# Altium PCB PCB_Final.PcbDoc
Units mm, origin at the board's own origin, x right, y up, seen from the top; angles counter-clockwise.
Board outline 57.53 x 59.31 mm, 2 copper layers (Top Layer, Bottom Layer); 42 components, 23 nets, 210 pads, 0 vias.
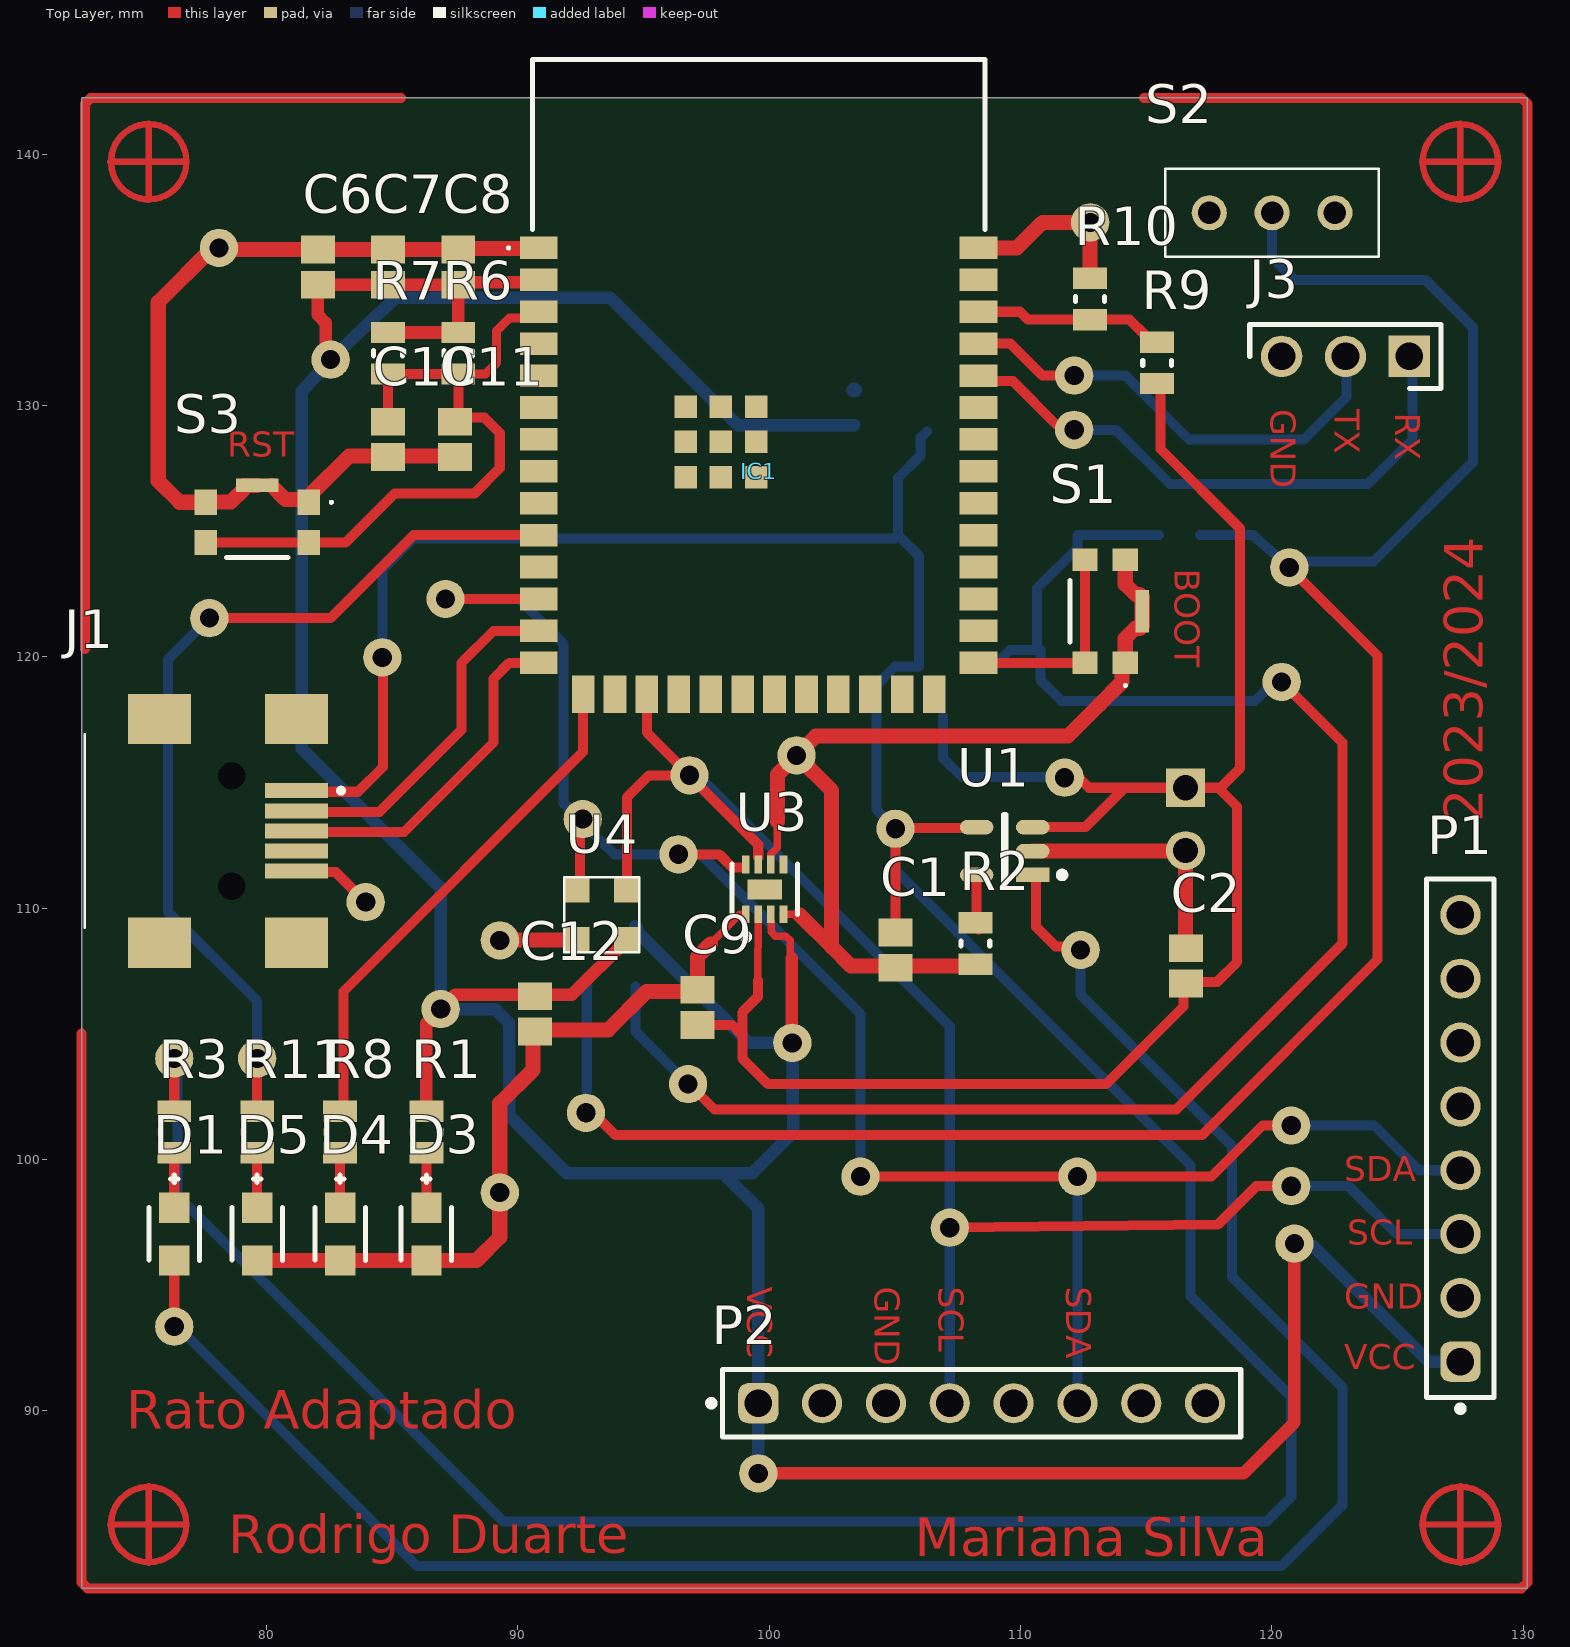
[diagram p0: Top Layer view]
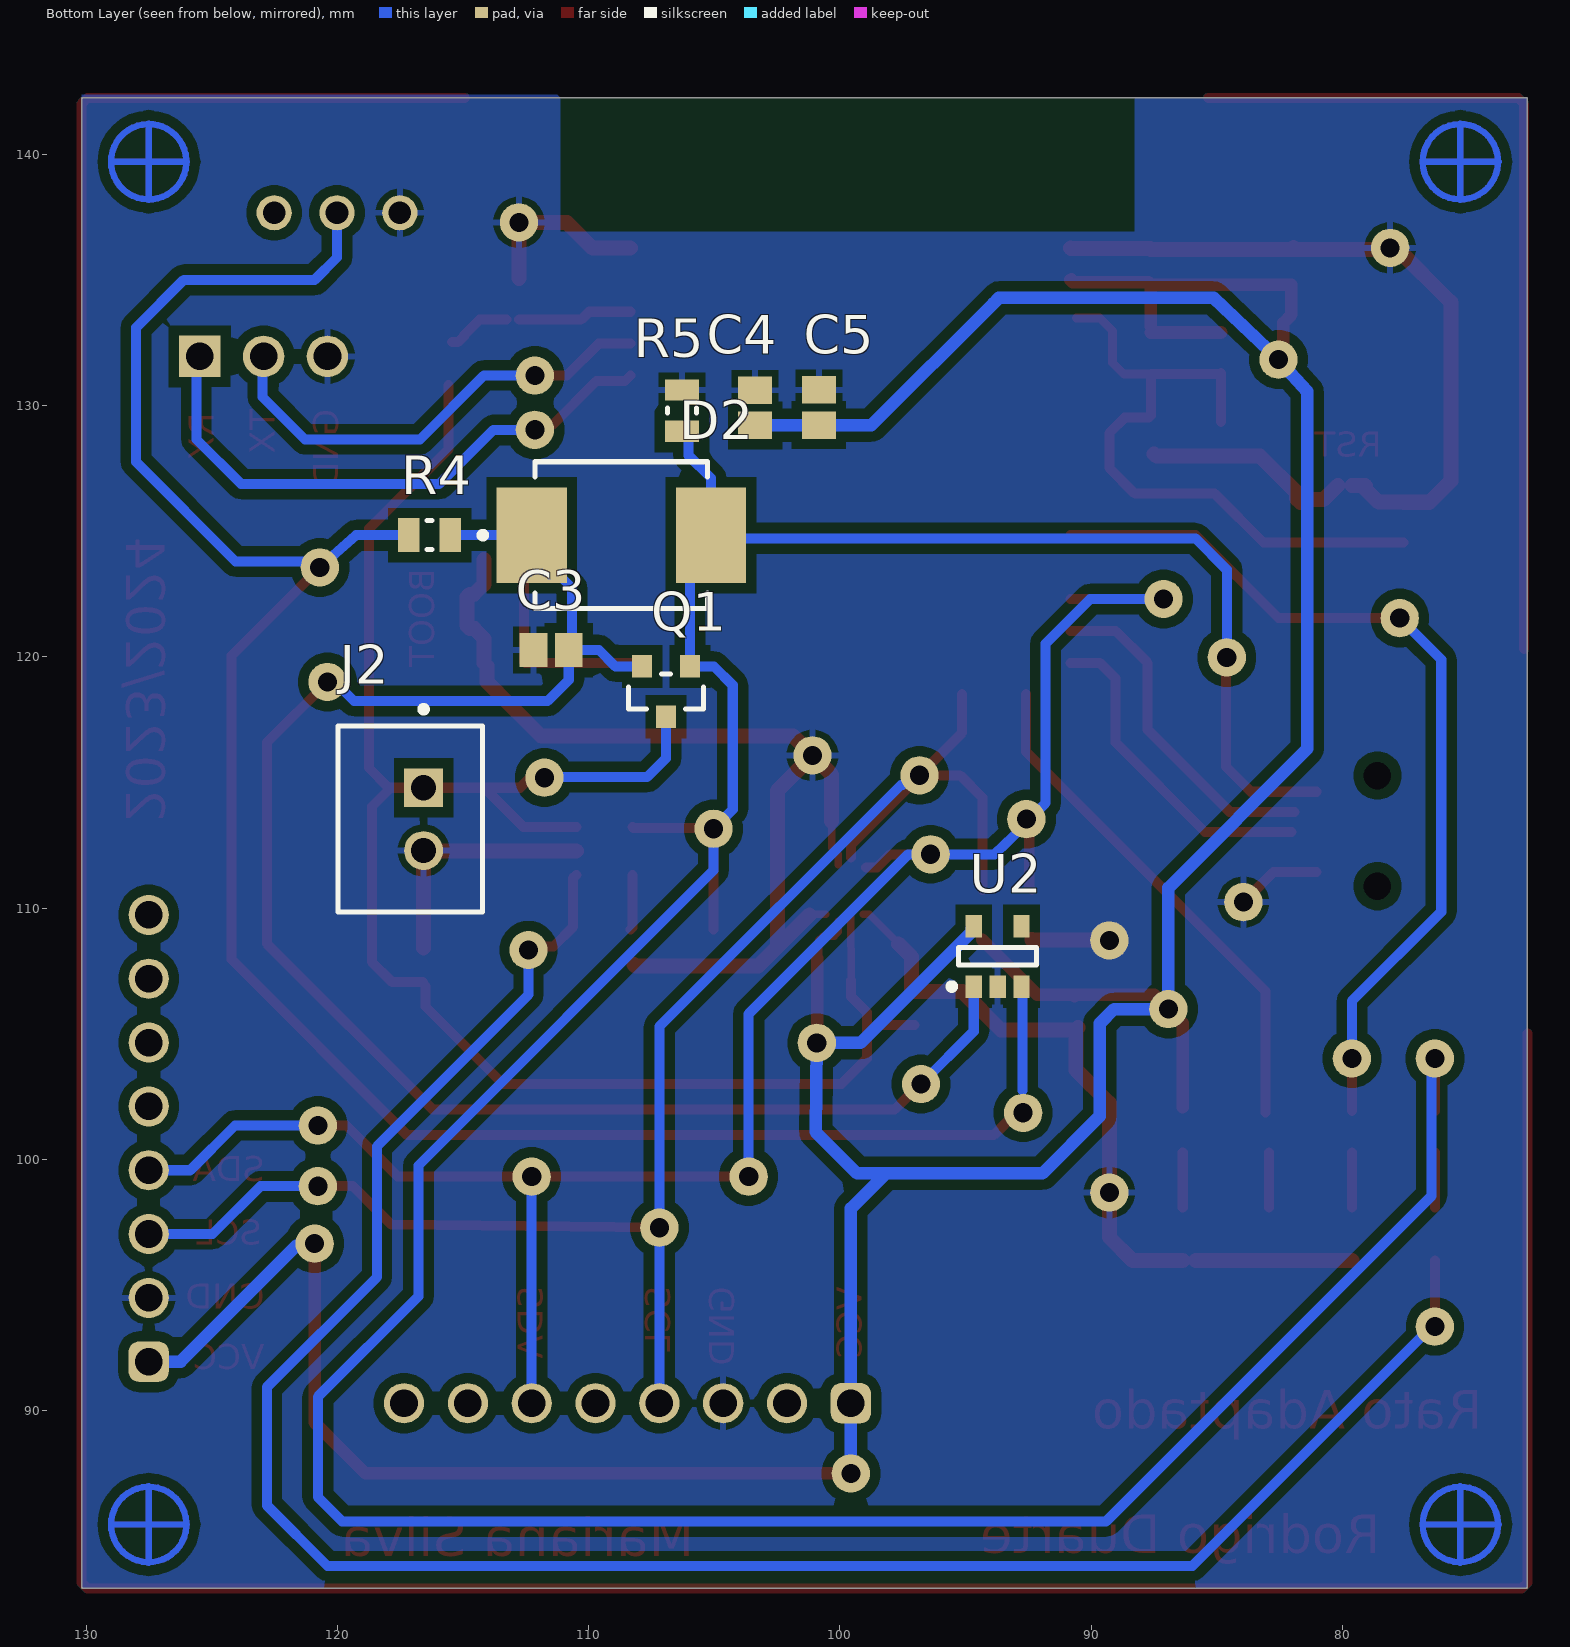
[diagram p1: Bottom Layer view, seen from below]

## Layer stack, top to bottom
Top Solder: solder mask 0.0102, Solder Resist, Dk 3.5
Top Layer: signal copper 0.0356
Dielectric 1: dielectric 0.32, FR-4, Dk 4.8
Bottom Layer: signal copper 0.0356
Bottom Solder: solder mask 0.0102, Solder Resist, Dk 3.5

## Board outline
72.644,142.24 130.175,142.24 130.175,82.931 72.644,82.931

## Design rules (kind name [scope] priority, off if disabled: settings)
Clearance [All] p1: gap=0.4 ignorepadtopadclearanceinfootprint=FALSE
PlaneConnect [All] p1: planeconnectstyle=Relief reliefexpansion=0.508 reliefentries=4 reliefconductorwidth=0.254 reliefairgap=0.4
PolygonConnect [All] p1: connectstyle=Relief reliefconductorwidth=0.254 reliefentries=4 polygonreliefangle="90 Angle" airgapwidth=0.254
RoutingVias [All] p1: holewidth=0.8 width=1.5 viastyle="Through Hole" minholewidth=0.8 minwidth=1.5 maxholewidth=0.8 maxwidth=1.5
SolderMaskExpansion [All] p1: expansion=0.102 istentingtop=FALSE
Width [All] p1: maxlimit=0.6 minlimit=0.3 preferedwidth=0.4
29 further rules are at their usual default settings.

## Components (designator, comment, footprint, x,y, rotation, side; value= is the part's Value field where it differs from the comment)
C1 "10uF" CAPC2013X88X50LL20T25 105.029,108.331 r90 top
C2 "4,7uF" CAPC2013X88X50LL20T25 116.586,107.696 r270 top
C3 "1uF" CAPC2013X88X50LL20T25 111.494,120.269 r180 bottom
C4 "1uF" CAPC2013X88X50LL20T25 103.378,129.909 r270 bottom
C5 "10uF" CAPC2013X88X50LL20T25 100.838,129.921 r270 bottom
C6 "10uF" CAPC2013X88X50LL20T25 82.042,135.509 r270 top
C7 "10uF" CAPC2013X88X50LL20T25 84.836,135.509 r270 top
C8 "1uF" CAPC2013X88X50LL20T25 87.63,135.509 r270 top
C9 "0.1uF" CAPC2013X88X50LL20T25 97.155,106.045 r270 top
C10 "1uF" CAPC2013X88X50LL20T25 84.836,128.651 r90 top
C11 "1uF" CAPC2013X88X50LL20T25 87.503,128.651 r90 top
C12 "0.1 uF" CAPC2013X88X50LL20T25 90.678,105.791 r270 top
D1 "LH R974-LP-1" FP-LH_R974-MFG 76.327,97.028 r270 top
D2 "NRVBS540T3G" ONSC-SMC-2-403-03_V 108.7,124.841 r180 bottom
D3 "LH R974-LP-1" FP-LH_R974-MFG 86.36,97.028 r270 top
D4 "LH R974-LP-1" FP-LH_R974-MFG 82.931,97.028 r270 top
D5 "LH R974-LP-1" FP-LH_R974-MFG 79.629,97.028 r270 top
IC1 "ESP32-S3-WROOM-1-N16R8" ESP32S3WROOM1N16R8 99.581,131.011 r0 top
J1 "MUSB-05-F-AB-SM-A-K-TR" MUSB05FABSMAKTR 77.363,113.071 r270 top
J2 "B2B-XH-A(LF)(SN)" FP-B2B-XH-A_LF_SN-MFG 117.094,113.538 r270 bottom
J3 "TSW-101-07-T-T" HDRV3W64P254_3X1_254X762X838P 125.476,131.953 r90 top
P1 "61300811121" 61300811121 127.508,100.838 r90 top
P2 "61300811121" 61300811121 108.458,90.297 r0 top
Q1 "DMG2305U" FP-SOT23-MFG 106.922,118.618 r270 bottom
R1 "1k" RESC2013X50X30LL20T20 86.36,101.092 r90 top
R2 "2k" RESC2013X50X30LL20T20 108.204,108.585 r90 top
R3 "1k" RESC2013X50X30LL20T20 76.327,101.092 r90 top
R4 "10k" RESC2013X50X30LL20T20 116.332,124.841 r180 bottom
R5 "10k" RESC2013X50X30LL20T20 106.287,129.794 r270 bottom
R6 "10k" RESC2013X50X30LL20T20 87.63,132.08 r90 top
R7 "5.1k" RESC2013X50X30LL20T20 84.836,132.08 r270 top
R8 "1k" RESC2013X50X30LL20T20 82.931,101.092 r90 top
R9 "27k" RESC2013X50X30LL20T20 115.443,131.699 r270 top
R10 "100k" RESC2013X50X30LL20T20 112.776,134.239 r270 top
R11 "1k" RESC2013X50X30LL20T20 79.629,101.092 r90 top
S1 "435451019820" 435451019820 113.373,121.811 r270 top
S2 "SS12D00G3" SS12D00G3 120.015,137.668 r180 top
S3 "435451019820" 435451019820 79.629,125.349 r0 top
U1 "MCP73831T-2ACI/OT" FP-C04-091-OT-IPC_B 109.374,112.268 r180 top
U2 "XC6222B331MR-G" TORX-SOT-25-5_L 93.726,108.077 r90 bottom
U3 "MAX17048G+" FP-T822-3-MFG 99.822,110.744 r90 top
U4 "LPS33KTR" LPS33KTR 93.345,109.728 r90 top

## Footprints (in the part's own frame and the unit in brackets; to place one, negate y for a bottom-side part, rotate by r counter-clockwise, add the part's x,y. Pads: shape width x height; smd on the part's side, far side on the other; paste and mask are expansions set on the pad)
61300811121 [mm] "Pin Header, pitch 2.54 mm, THT, Vertical, single row, 8p"
  rrect50% 1.6x1.6 hole 1.1: 1(-8.89,0)
  round 1.6 hole 1.1: 2(-6.35,0) 3(-3.81,0) 4(-1.27,0) 5(1.27,0) 6(3.81,0) 7(6.35,0) 8(8.89,0)
  silkscreen extent -10.88,-1.35 10.31,1.35, body extent -10.16,-1.27 10.16,1.27, height 8.57
435451019820 [mm]
  rect 0.9x1 smd: 1(2.05,0.8) 2(2.05,-0.8) 3(-2.05,-0.8) 4(-2.05,0.8)
  rect 1.7x0.55 smd: 5(0,1.475)
  silkscreen extent -1.23,-1.4 3,0.85, body extent -2.3,-1.4 2.3,1.45, height 1.9
CAPC2013X88X50LL20T25 [mm] "Chip Capacitor, 2-Leads, Body 2.00x1.25mm, IPC High Density"
  rect 1.1x1.35 smd: 1(-0.7,0) 2(0.7,0)
  body extent -1.1,-0.72 1.1,0.72, height 0.88
ESP32S3WROOM1N16R8 [mm]
  rect 1.5x0.9 smd: 1(-8.75,5.26) 2(-8.75,3.99) 3(-8.75,2.72) 4(-8.75,1.45) 5(-8.75,0.18) 6(-8.75,-1.09) 7(-8.75,-2.36) 8(-8.75,-3.63) 9(-8.75,-4.9) 10(-8.75,-6.17) 11(-8.75,-7.44) 12(-8.75,-8.71) 13(-8.75,-9.98) 14(-8.75,-11.25) 27(8.75,-11.25) 28(8.75,-9.98) 29(8.75,-8.71) 30(8.75,-7.44) 31(8.75,-6.17) 32(8.75,-4.9) 33(8.75,-3.63) 34(8.75,-2.36) 35(8.75,-1.09) 36(8.75,0.18) 37(8.75,1.45) 38(8.75,2.72) 39(8.75,3.99) 40(8.75,5.26)
  rect 0.9x1.5 smd: 15(-6.985,-12.5) 16(-5.715,-12.5) 17(-4.445,-12.5) 18(-3.175,-12.5) 19(-1.905,-12.5) 20(-0.635,-12.5) 21(0.635,-12.5) 22(1.905,-12.5) 23(3.175,-12.5) 24(4.445,-12.5) 25(5.715,-12.5) 26(6.985,-12.5)
  rect 0.9x0.9 smd: 41(-1.5,-2.46) 42(-2.9,-1.06) 43(-2.9,-2.46) 44(-2.9,-3.86) 45(-1.5,-3.86) 46(-0.1,-3.86) 47(-0.1,-2.46) 48(-0.1,-1.06) 49(-1.5,-1.06)
  silkscreen extent -10,5.21 9,12.75, body extent -9,-12.75 9,12.75, height 3.25
FP-B2B-XH-A_LF_SN-MFG [mm]
  rect 1.55x1.55 hole 1 paste-2539.97 mask+0: 1(-1.25,0.525)
  round 1.55 hole 1 paste-2539.97 mask+0: 2(1.25,0.525)
  silkscreen extent -4.5,-2.88 3.7,2.88, body extent -3.7,-2.88 3.7,2.88, height 7
FP-C04-091-OT-IPC_B [mm]
  rect 1.338x0.578 smd paste+0 mask+0: 1(-1.116,0.95)
  rrect100% 1.338x0.578 smd paste+0 mask+0: 2(-1.116,0) 3(-1.116,-0.95) 4(1.116,-0.95) 5(1.116,0.95)
  silkscreen extent -2.41,-1.45 0.05,1.45
FP-LH_R974-MFG [mm]
  rect 1.2x1.2 smd paste+0 mask+0: 1(-1.05,0) 2(1.05,0)
  silkscreen extent -2.35,-1 1.05,1, body extent -1.75,-0.8 1.75,0.8, height 0.25
FP-SOT23-MFG [mm]
  rect 0.9x0.8 smd paste+0 mask+0: 1(-1,0.95) 2(-1,-0.95) 3(1,0)
  silkscreen extent -0.7,-1.5 0.7,1.5, body extent -1.2,-1.5 1.2,1.5, height 1.1
FP-T822-3-MFG [mm]
  rect 0.7x0.3 smd paste+0 mask+0: 1(-0.99,0.75) 2(-0.99,0.25) 3(-0.99,-0.25) 4(-0.99,-0.75) 5(0.99,-0.75) 6(0.99,-0.25) 7(0.99,0.25) 8(0.99,0.75)
  rect 0.8x1.38 smd paste+0 mask+0: 9(0,0)
  silkscreen extent -2.01,-1.3 1,1.3, body extent -1.44,-1.15 1.44,1.15, height 0.25
HDRV3W64P254_3X1_254X762X838P [mm]
  rect 1.65x1.65 hole 1.1: 1(0,0)
  round 1.65 hole 1.1: 2(0,2.54) 3(0,5.08)
  silkscreen extent -1.27,-1.27 1.27,6.35, body extent -1.27,-1.27 1.27,6.35, height 8.38
LPS33KTR [mm]
  rect 1x1 smd mask+0.05: 1(-0.989,0.991) 2(-0.989,-0.991) 3(0.989,-0.991) 4(0.989,0.991)
  silkscreen extent -1.49,-1.49 1.49,1.49
MUSB05FABSMAKTR [mm]
  rect 0.6x2.5 smd: 1(-1.6,3.83) 2(-0.8,3.83) 3(0,3.83) 4(0.8,3.83) 5(1.6,3.83)
  round 0.55 hole 1.1 unplated: MH1(-2.2,1.25) MH2(2.2,1.25)
  rect 2x2.5 smd: MP1(-4.45,3.83) MP2(4.45,3.83) MP3(-4.45,-1.62) MP4(4.45,-1.62)
  silkscreen extent -3.85,-4.6 3.85,5.7, body extent -5.25,-4.6 5.25,5.02, height 4.2
ONSC-SMC-2-403-03_V [mil] "Molded, 2-Leads, Body 6.86x5.84mm"
  rect 110x150 smd: 1(-140.49,0) 2(140.49,0)
  silkscreen extent -222,-115 135,115, body extent -135,-115 135,115, height 99
RESC2013X50X30LL20T20 [mm] "Chip Resistor, 2-Leads, Body 2.00x1.25mm, IPC High Density"
  rect 0.85x1.35 smd: 1(-0.825,0) 2(0.825,0)
  silkscreen extent -0.1,-0.58 0.1,0.58, body extent -1.1,-0.72 1.1,0.72, height 0.5
SS12D00G3 [mm]
  round 1.4 hole 0.9: 1(-2.5,0) 2(0,0) 3(2.5,0)
  silkscreen extent -4.25,-1.75 4.25,1.75, body extent -4.25,-1.75 4.25,1.75, height 6.88
TORX-SOT-25-5_L [mm] "SOT23, 5-Leads, Body 3.1x1.8mm, Pitch 0.95mm, IPC High Density"
  rect 0.9x0.65 smd: 1(-1.2,0.95) 2(-1.2,0) 3(-1.2,-0.95) 4(1.2,-0.95) 5(1.2,0.95)
  silkscreen extent -1.32,-1.55 0.35,1.95, body extent -0.9,-1.55 0.9,1.55, height 1.3

## Part data
C1 C2 C3 C4 C5 C6 C7 C8 C9 C10 C11 C12: library part CMP-2007-00266-1, Manufacturer=Kemet, Part Number=C0805C103K5RACTU
D1 D3 D4 D5: library part CMP-2000-06540-2, "LED RED DIFFUSED 0805 SMD", Forward Current=30mA, Forward Voltage=2.6V, Max Operating Temperature=85°C, Min Operating Temperature=-30°C, Reverse Voltage=5V, Test Current=20mA, Depth=1.35mm, Dominant Wavelength=645nm, Length=2.1mm, Lens Style=Diffused, Luminous Intensity=15mcd, Mount="Surface Mount", Number of Elements=1, Number of Pins=2, Packaging="Tape and Reel", Radiation Hardening=No, Viewing Angle=160°
D2: library part CMP-1055-00391-1, "Schottky Power Rectifier, 2-Pin SMC, Pb-Free, Tape and Reel", Manufacturer="On Semiconductor", ComponentLink1Description="Manufacturer URL", ComponentLink1URL=http://www.onsemi.com/, ComponentLink2Description=Datasheet, ComponentLink2URL=http://www.onsemi.cn/pub_link/Collateral/MBRS540T3-D.PDF, ComponentLink3Description="Package Specification", ComponentLink3URL=http://www.onsemi.com/pub_link/Collateral/403-03.PDF, Configuration=Single, DatasheetVersion="Rev. 8", IFSM Max (A)=190, Mounting Technology="Surface Mount", PackageDescription="2-Pin Small Molded Package, J-Bend Lead, Body 5.845 x 6.855 mm", PackageReference=SMC-2-403-03, PackageVersion="Rev. E, 08/2005", Packing="Tape and Reel", PartNumber=NRVBS540T3G, RoHS=TRUE
IC1: "Integrated Circuit", Manufacturer_Name="Espressif Systems", Mouser Part Number=356-ESP32S3WRM1N16R8, Datasheet Link=https://www.espressif.com/sites/default/files/documentation/esp32-s3-wroom-1_wroom-1u_datasheet_en.pdf, Height=3.25mm, Manufacturer_Part_Number=ESP32-S3-WROOM-1-N16R8, Mouser Price/Stock=https://www.mouser.co.uk/ProductDetail/Espressif-Systems/ESP32-S3-WROOM-1-N16R8?qs=Li%252BoUPsLEnvQc9gW6AMhZg%3D%3D
J1: "Connector", Manufacturer_Name=SAMTEC, Mouser Part Number=200-MUSB05FABSMAKTR, Arrow Part Number=MUSB-05-F-AB-SM-A-K-TR, Arrow Price/Stock=https://www.arrow.com/en/products/musb-05-f-ab-sm-a-k-tr/samtec?region=nac, Datasheet Link=http://suddendocs.samtec.com/prints/musb-05-x-ab-sm-a-xx-mkt.pdf, Height=4.1mm, Manufacturer_Part_Number=MUSB-05-F-AB-SM-A-K-TR, Mouser Price/Stock=https://www.mouser.co.uk/ProductDetail/Samtec/MUSB-05-F-AB-SM-A-K-TR?qs=FESYatJ8odIUaVE%2F1ECHaA%3D%3D
J2: library part CMP-2000-05888-3, "CONN HEADER VERT 2POS 2.5MM", Color=Natural, Contact Resistance=20mR, Current Rating=3A, Housing Color=White, Insulation Resistance=1GR, Max Operating Temperature=85°C, Max Voltage Rating (AC)=250V, Min Operating Temperature=-25°C, Connector Type="Male Pin", Contact Material=Brass, Contact Plating=Tin, Contact Type="Male Pin", Depth=5.75mm, Fastening Type=Detent, Housing Material=Polyamide, Lead Free="Lead Free", Lead Pitch=2.5mm, Length=7.4mm, Max Current Rating=3A, Max Voltage Rating (DC)=250V, Mount="Through Hole", Number of Contacts=2, Number of Positions=2, Number of Rows=1, Orientation=Straight, Packaging=Bulk, Pitch=2.5mm, REACH SVHC="No SVHC", Series=XH, Termination=Solder, Voltage Rating=250V, Voltage Rating (AC)=250V, Wire/Cable Gauge=22AWG
J3: "Connector", Manufacturer_Name=SAMTEC, Datasheet Link=https://suddendocs.samtec.com/catalog_english/tsw_th.pdf, Height=8.38mm, Manufacturer_Part_Number=TSW-101-07-T-T
P1 P2: library part CMP-1502-01076-3, Color=Black, Contact Resistance=20mΩ, Current Rating=3A, Max Operating Temperature=105°C, Min Operating Temperature=-40°C, Operating Supply Voltage=250V, Connector Type="Male Pin", Contact Material=Copper, Contact Mating Length=5.9944mm, Contact Plating=Gold, Gender=Male, Height=8.54mm, Lead Pitch=2.54mm, Mount="Through Hole", NexarPartId=32855533, Number of Contacts=8, Number of Pins=8, Number of Positions=8, Number of Rows=1, Orientation=Vertical, Packaging=Bulk, Pitch=2.54mm, REACH SVHC=Unknown, RoHS=Compliant, Termination=Solder, Voltage Rating=250V
Q1: library part CMP-12801-000021-1, "MOSFET P-CH 20V 4.2A SOT23", Continuous Drain Current=-4.2A, Drain To Source Breakdown Voltage=-20V, Drain To Source Resistance=40mΩ, Gate To Source Voltage=8V, Input Capacitace At Vds="808pF @ -15V", Manufacturer="Diodes Inc.", Manufacturer Part Number=DMG2305UX-13, Max Junction Temp=+150°C, Package=SOT23, Power Dissipation=1.4W, Pulse Drain Current=-15A, Temperature="-55°C to +150°C", Temperature Range Low=-55°C, Automotive=No, Category=Trans, ComponentLink2Description=Datasheet, ComponentLink2URL=https://www.diodes.com/assets/Datasheets/DMG2305UX.pdf, Depletion Mode=False, Device Class L1="Discrete Semiconductors", Device Class L2=Transistors, Device Class L3=MOSFETs, Digikey Description="MOSFET P-CH 20V 4.2A SOT23", Drain To Source Voltage=-20V, Footprint Url=https://www.diodes.com/assets/Package-Files/SOT23.pdf, Gate Charge At Vgs="10.2nC @ -4.5V", Height=1.1mm, Ipc Land Pattern Name=SOT92P240X102-3, Lead Free=Yes, Mouser Description="MOSFET P-Ch ENH FET -20V 52mOhm -5.0V", Number Of Channels=1, Number Of P Channels=1, Octopart=https://octopart.com/dmg2305ux-13-diodes+inc.-29925594, RoHS=TRUE, Rthja Max=90°C/W, Standoff Height=0.013mm, Temperature Range High=+150°C, Threshold Vgs Max=-0.9V, Threshold Vgs Min=-0.5V, Turn Off Delay Time=79.3ns, Turn On Delay Time=10.8ns
R1 R2 R3 R4 R5 R6 R7 R8 R9 R10 R11: library part CMP-2001-04896-1, Manufacturer="Vishay Dale", Part Number=CRCW08050000Z0EA
S1 S3: "Switch", Manufacturer_Name="Wurth Elektronik", Mouser Part Number=710-435451019820, Datasheet Link=https://www.we-online.com/components/products/datasheet/435451019820.pdf, Height=1.97mm, Manufacturer_Part_Number=435451019820, Mouser Price/Stock=https://www.mouser.co.uk/ProductDetail/Wurth-Elektronik/435451019820?qs=ufv2HEpFn%252BSBtTHyYvulMg%3D%3D
S2: "Switch", Manufacturer_Name=Vimex, Datasheet Link=http://vimex.com/switches/techdocs/SS12D00-tech.pdf, Height=7mm, Manufacturer_Part_Number=SS12D00G3
U1: library part CMP-0133-00143-2, "IC CONTROLLR LI-ION 4.2V SOT23-5", Case/Package=SOT-23, Drain To Source Resistance=350mR, Max Charge Current=500mA, Max Input Voltage=6V, Max Operating Temperature=85°C, Max Output Voltage=4.5V, Max Power Dissipation=1.54W, Min Operating Temperature=-40°C, Min Output Voltage=4.168V, Min Supply Voltage=3.75V, Output Voltage=4.2V, Voltage Rating=4.534V, Contact Plating=Tin, Height=0.051inch, Lead Free="Lead Free", Length=0.122inch, Max Supply Voltage=6V, Mount="Surface Mount", Number of Cells=1, Number Of Channels=1, Number of Outputs=1, Number of Pins=5, Output Current=500mA, Packaging="Tape and Reel", Radiation Hardening=No, REACH SVHC="No SVHC", Termination=SMD/SMT, Weight=0.00709oz, Width=0.071inch
U2: library part CMP-0659-00001-1, "High Speed LDO Regulator, 700 mA, 1.7 to 6.0 V, -40 to 85 degC, SOT-25 (MR-G), RoHS, Tape and Reel", Dropout Voltage="120 mV @Iout=300 mA (Vout=3.0 V)", Low Power Consumption="100 uA", Manufacturer=Torex, Operating Ambient Temperature="-40 to 85 degC", Operating Voltage Range="1.7 to 6 V", Out Current (Max)="700 mA", Output Voltage="0.8 to 5 V (0.05 V increments)", Accuracy="+/- 1% (Vout>2.0 V) +/- 0.02 V (Vout<=2.0 V)", ComponentLink1Description="Manufacturer URL", ComponentLink1URL=http://www.torex.co.jp/, ComponentLink2Description=Datasheet, ComponentLink2URL=http://www.torex.co.jp/english/products/voltage_regulators/data/XC6222.pdf, DatasheetVersion=Dec-13, Mounting Technology="Surface Mount", PackageDescription="5-Pin Small Out-Line Transistor, Body 2.9 x 1.6 mm, Pitch 0.95 mm", PackageReference=MR-G-5, Packing="Tape and Reel", PartNumber=XC6222B331MR-G, RoHS=TRUE
U3: library part CMP-05715-000164-1, "IC BATT MON LI-ION 1CELL 8TDFN", Max Operating Temperature=85°C, Min Operating Temperature=-20°C, Operating Supply Current=23uA, Operating Supply Voltage=4.5V, Output Voltage=400mV, Package Quantity=1, Mount="Surface Mount", Number of Pins=8, Packaging=Rail/Tube, Radiation Hardening=No, RoHS Compliant=Yes, Series=ModelGauge™

## Free pads (board coordinates)
  round 1.524 hole 0.762: 22(87.122,122.301) 27(112.776,137.287) 31(111.76,115.189) 32(105.029,113.157) 36(120.396,118.999) 37(92.71,101.854) 38(96.774,102.997) 39(120.699,123.556) 40(112.141,131.191) 41(112.141,129.032) 47(82.55,131.826) 48(78.105,136.271) 49(76.327,104.013) 50(112.395,108.331) 51(76.327,93.345) 53(84.606,119.976) 55(100.921,104.636) 58(77.724,121.539) 61(96.832,115.284) 62(101.092,116.078) 63(79.629,104.013) 65(83.947,110.236) 66(103.632,99.314) 67(112.268,99.314) 68(120.777,101.346) 69(107.188,97.282) 70(120.777,98.933) 71(120.904,96.647) 74(99.568,87.503) 75(89.281,98.679) 77(96.393,112.141) 78(92.583,113.538) 79(86.931,105.981) 80(89.281,108.712)

## Nets (pads, with @x,y where several pads share a name; then routed paths per layer and width w, separated by ;. In a path a pad name is that pad's centre, name@x,y a point inside that pad or via, vN(x,y) a via of type N, cw(c..) or ccw(c..) an arc to the next point about the centre after c; other vN are vias at no path point)
3.3V: C4.2 C5.2 C6.2 C7.2 C8.2 C12.1 IC1.2 P1.1 P2.1 pad.47 pad.55 pad.71 pad.74 pad.79 R1.2 R6.2 R7.1 U2.5 U3.3 U4.2 | length 169.8
  Top Layer w0.3: U3.3@100.076,109.474 100.076,109.05 100.238,108.888 100.662,108.888 100.838,108.712 100.838,108.067
  Top Layer w0.5: pad.47 82.354,132.022 82.354,133.292 82.042,133.604 C6.2 C7.2 C8.2 ; R7.1 R6.2 ; R1.2@86.36,102.067 86.36,105.41 pad.79 87.503,106.553 C12.1@90.74,106.553 ; R6.2@87.63,133.159 C8.2 ; C12.1 C12.1@90.74,106.553 ; IC1.2@90.8,135.032 IC1.2 90.735,134.905 87.726,134.905 C8.2 ; U4.2 92.15,106.553 C12.1@90.74,106.553 ; pad.74 118.872,87.503 120.904,89.535 pad.71 ; 100.907,107.998 100.907,104.717 pad.55
  Bottom Layer w0.5: U2.5 94.751,109.202 94.751,109.077 99.192,104.636 pad.55 100.965,101.092 99.314,99.441 98.171,99.441 ; pad.74 P2.1 99.568,98.044 98.171,99.441 ; C4.2 98.964,129.209 98.756,129.209 93.897,134.068 93.682,134.283 85.137,134.283 pad.47 81.407,130.556 81.407,116.332 86.931,110.808 pad.79 89.09,105.981 89.662,105.41 89.662,101.727 91.948,99.441 98.171,99.441 ; pad.71 120.457,96.586 121.6,96.586 126.238,91.948 P1.1
GND: C1.1 C2.1 C3.1 C4.1 C5.1 C6.1 C7.1 C8.1 C9.1 C10.1 C11.1 C12.2 D3.2 D4.2 D5.2 IC1.1 IC1.40 J1.5 J2.2 J3.3 P1.2 P2.3 pad.27 pad.48 pad.62 pad.65 pad.75 pad.80 R2.1 R5.1 R10.1 S1.1 S1.4 S1.5 S2.3 S3.1 S3.4 S3.5 U1.2 U2.2 U3.1 U3.4 U3.6 U4.1 | length 131.2
  Top Layer w0.3: 97.727,108.648 98.832,109.754 U3.1 ; U3.6 100.072,112.137 100.33,112.395 100.33,113.448 ; U3.4 101.193,109.754 101.219,109.728
  Top Layer w0.4: J1.5@81.046,111.43 82.753,111.43 pad.65
  Top Layer w0.6: D5.2 D4.2 D3.2@85.852,95.978 ; S3.5 79.104,126.824 79.079,126.799 79.079,126.656 78.578,126.155 77.585,126.155 S3.4 76.543,126.149 75.692,127 75.692,134.108 77.855,136.271 pad.48 78.105,136.209 C6.1 ; S3.5@80.186,126.824 80.759,126.251 81.577,126.251 S3.1 81.829,126.299 81.829,126.533 83.28,127.984 87.409,127.984 C11.1@87.503,128.078 ; C6.1@81.959,136.292 C6.1 ; D3.2 88.358,95.978 89.281,96.901 pad.75 89.281,102.235 90.603,103.557 C12.2@90.603,105.166 ; pad.80 89.295,108.726 92.341,108.726 U4.1 ; C12.2@90.528,105.241 C12.2@90.603,105.166 ; IC1.1 90.8,136.24 87.661,136.24 C8.1 C7.1 C6.1 ; 97.663,108.569 97.155,108.061 C9.1 97.09,106.68 95.123,106.68 93.599,105.156 90.743,105.156 C12.2 C12.2@90.603,105.166 ; 100.33,113.448 100.33,115.316 pad.62 ; 101.219,109.728 102.489,108.458 ; R2.1 108.14,107.696 103.251,107.696 102.489,108.458 ; IC1.40 109.855,136.271 110.871,137.287 pad.27 R10.1 ; U1.2 110.5,112.278 116.559,112.278 J2.2 C2.1@116.569,108.413 ; S1.4 114.173,122.886 114.573,122.486 114.748,122.486 114.848,122.386 S1.5 114.848,121.236 114.748,121.136 114.573,121.136 114.173,120.736 S1.1 114.038,119.626 114.038,118.991 113.157,118.11 111.887,116.84 101.854,116.84 pad.62 ; pad.62 102.489,114.681 102.489,108.458
  Bottom Layer w0.6: C4.1 C4.1@103.388,130.619 ; pad.27@112.522,137.16 112.649,137.033 pad.27@112.678,137.062
NetC3_2: C3.2 D2.1 pad.36 pad.38 Q1.2 R4.2 U2.1 | length 68.4
  Top Layer w0.4: pad.38 96.808,102.997 97.824,101.981 116.205,101.981 122.809,108.585 122.809,116.586 pad.36
  Bottom Layer w0.4: U2.1 94.676,105.095 pad.38 ; Q1.2 108.938,119.618 109.589,120.269 110.669,120.269 110.669,122.734 112.268,124.333 D2.1 R4.2 ; C3.2 110.794,119.076 111.633,118.237 119.338,118.237 120.1,118.999 pad.36
NetC10_2: C10.2 C11.2 IC1.3 R6.1 R7.2 S3.2 S3.3 | length 27.1
  Top Layer w0.35: R6.1 88.71,131.255 89.154,131.699 89.154,132.969 89.671,133.486 IC1.3@90.586,133.486
  Top Layer w0.4: S3.3 S3.2@81.552,124.549 ; S3.2 83.147,124.549 85.09,126.492 88.265,126.492 89.281,127.508 89.281,128.905 88.671,129.515 87.72,129.515 87.63,129.605 R6.1 R7.2 ; C10.2 R7.2@84.836,131.284
NetD1_1: D1.1 R3.1 | length 2.2
  Top Layer w0.4: D1.1 R3.1
NetD1_2: D1.2 pad.50 pad.51 U1.1 | length 84.9
  Top Layer w0.4: pad.51 D1.2 ; U1.1 110.503,111.318 110.617,111.204 110.617,109.254 111.404,108.467 112.259,108.467 pad.50
  Bottom Layer w0.4: pad.51@76.275,93.524 85.979,83.82 120.396,83.82 122.809,86.233 122.809,90.932 118.427,95.313 118.427,100.52 112.395,106.553 pad.50
NetD3_1: D3.1 R1.1 | length 2.2
  Top Layer w0.4: D3.1 R1.1
NetD4_1: D4.1 R8.1 | length 2.2
  Top Layer w0.4: D4.1 R8.1
NetD5_1: D5.1 R11.1 | length 2.2
  Top Layer w0.4: D5.1 R11.1
NetIC1_10: IC1.10 pad.58 pad.63 R11.2 | length 36.6
  Top Layer w0.4: pad.58@78.234,121.742 78.074,121.742 pad.58 82.55,121.539 85.852,124.841 IC1.10 ; R11.2 pad.63
  Bottom Layer w0.4: pad.58 76.073,119.888 76.073,109.855 79.629,106.299 pad.63@79.629,104.22
NetIC1_13: IC1.13 J1.2 | length 13.5
  Top Layer w0.4: J1.2@81.915,113.83 84.493,113.83 87.757,117.094 87.757,119.761 89.027,121.031 IC1.13
NetIC1_14: IC1.14 J1.3 | length 13.1
  Top Layer w0.4: J1.3@82.042,113.03 84.058,113.03 85.471,113.03 89.027,116.586 89.027,118.745 89.027,119.126 89.662,119.761 90.281,119.761 IC1.14
NetIC1_15: IC1.15 R8.2 | length 20.6
  Top Layer w0.4: R8.2@83.058,101.864 83.058,106.68 92.596,116.218 IC1.15
NetIC1_27: IC1.27 S1.2 S1.3 | length 8.3
  Top Layer w0.4: IC1.27 112.522,119.761 112.573,119.812 S1.3
NetIC1_36: IC1.36 J3.1 pad.41 | length 22.7
  Top Layer w0.4: IC1.36 108.551,130.971 109.694,130.971 111.418,129.247 111.926,129.247 pad.41
  Bottom Layer w0.4: pad.41 113.792,129.032 115.951,126.873 123.825,126.873 125.603,128.651 J3.1@125.603,131.557
NetIC1_37: IC1.37 J3.2 pad.40 | length 18.6
  Top Layer w0.4: IC1.37 109.601,132.461 110.871,131.191 pad.40
  Bottom Layer w0.4: pad.40 114.173,131.191 116.713,128.651 121.285,128.651 122.975,130.341 122.975,131.914 J3.2
NetIC1_38: IC1.38 R9.1 R10.2 | length 7.1
  Top Layer w0.4: IC1.38 109.982,133.731 110.299,133.414 R10.2 ; R10.2@113.276,133.414 114.346,133.414 114.943,132.817 114.943,132.774 115.193,132.524 R9.1
NetR2_2: R2.2 U1.5 | length 2.2
  Top Layer w0.4: U1.5 108.258,109.229 R2.2@108.331,109.156
NetR4_1: pad.37 pad.39 R4.1 S2.2 U2.3 | length 85.4
  Top Layer w0.4: pad.37 92.994,101.854 93.883,100.965 117.221,100.965 124.206,107.95 124.206,120.049 pad.39
  Bottom Layer w0.4: 92.743,102.743 92.743,106.844 U2.3 ; R4.1 119.253,124.841 pad.39 120.748,123.796 124.05,123.796 128.016,127.762 128.016,133.096 126.111,135.001 120.904,135.001 120.015,135.89 S2.2
SCL: IC1.17 P1.3 P2.4 pad.61 pad.69 pad.70 U3.7 U4.3 | length 66.1
  Top Layer w0.4: U4.3 94.336,114.402 95.218,115.284 pad.61 95.136,116.98 IC1.17 ; pad.61@96.901,115.189 99.568,112.522 U3.7@99.568,112.014 ; pad.69 117.85,97.403 119.38,98.933 pad.70
  Bottom Layer w0.4: pad.61 97.136,115.284 97.521,114.899 97.572,114.899 107.188,105.283 pad.69 P2.4 P2.4@107.188,90.136 ; pad.70 123.063,98.933 124.968,97.028 P1.3
SDA: IC1.12 P1.4 P2.6 pad.22 pad.66 pad.67 pad.68 pad.77 pad.78 U3.8 U4.4 | length 77.5
  Top Layer w0.4: pad.22 IC1.12 ; U4.4 92.469,110.832 92.469,113.424 pad.78 ; pad.77 98.012,112.141 98.536,111.617 U3.8@98.955,111.617 ; pad.66 pad.67 117.602,99.314 119.634,101.346 pad.68
  Bottom Layer w0.4: pad.22 90.043,122.301 91.821,120.523 91.821,114.173 92.498,113.458 92.716,113.227 93.853,112.141 pad.77 97.282,112.141 103.632,105.791 pad.66 ; P2.6@112.268,90.229 P2.6 pad.67 ; pad.68 124.079,101.346 125.857,99.568 P1.4
VBAT: C2.2 C9.2 J2.1 pad.31 Q1.3 R9.2 U1.3 U3.2 | length 73.4
  Top Layer w0.3: 99.552,107.112 U3.2
  Top Layer w0.4: C9.2@97.028,105.345 C9.2 98.521,105.345 98.933,104.933 ; 99.552,107.112 99.552,106.472 98.933,105.853 98.933,104.933 ; U1.3 112.583,113.218 114.153,114.788 ; pad.31 112.078,115.443 112.733,114.788 114.153,114.788 ; R9.2@115.57,130.809 115.57,128.27 118.745,125.095 118.745,115.57 117.963,114.788 J2.1 114.153,114.788 ; C2.2@116.494,106.904 116.494,106.08 113.411,102.997 99.949,102.997 98.933,104.013 98.933,104.933 ; C2.2@116.586,107.065 117.835,107.065 118.618,107.848 118.618,114.046 117.983,114.681
  Bottom Layer w0.4: Q1.3 106.922,115.963 107.671,115.214 111.735,115.214 pad.31 111.525,114.982 pad.31@111.382,114.982
VBUS: C1.2 D2.2 J1.1 pad.32 pad.49 pad.53 Q1.1 R3.2 R5.2 U1.4 | length 149.2
  Top Layer w0.4: R3.2 pad.49 ; J1.1@81.046,114.63 83.642,114.63 84.631,115.619 84.631,119.81 pad.53 ; C1.2@105.029,109.158 pad.32 105.06,113.188 108.227,113.188 U1.4
  Bottom Layer w0.4: pad.49@76.454,104.051 76.454,98.552 89.408,85.598 119.813,85.598 120.777,86.562 120.777,90.551 116.776,94.551 116.776,99.758 105.029,111.506 pad.32 105.029,113.163 104.267,113.925 104.267,118.872 105.013,119.618 Q1.1 105.972,124 D2.2 ; pad.53 84.606,123.468 85.852,124.714 105.004,124.714 D2.2 ; R5.2 106.283,128.969 106.033,128.719 106.033,128.016 105.131,127.114 D2.2
pads on no net: IC1.4 IC1.5 IC1.6 IC1.7 IC1.8 IC1.9 IC1.11 IC1.16 IC1.18 IC1.19 IC1.20 IC1.21 IC1.22 IC1.23 IC1.24 IC1.25 IC1.26 IC1.28 IC1.29 IC1.30 IC1.31 IC1.32 IC1.33 IC1.34 IC1.35 IC1.39 IC1.41 IC1.42 IC1.43 IC1.44 IC1.45 IC1.46 IC1.47 IC1.48 IC1.49 J1.4 J1.MH1 J1.MH2 J1.MP1 J1.MP2 J1.MP3 J1.MP4 P1.5 P1.6 P1.7 P1.8 P2.2 P2.5 P2.7 P2.8 S2.1 U2.4 U3.5 U3.9
copper on no net: | length 188.1
  Top Layer w0.4: 72.644,105.014 72.644,83.165 72.878,82.931 129.941,82.931 130.175,83.165 130.175,142.006 129.941,142.24 114.915,142.24 ; 72.771,120.311 72.771,142.006 73.005,142.24 85.344,142.24

## Polygon pours and split planes (outlines as drawn)
GND on Bottom Layer "GND_L02_P000" (solid, pour order 0): 72.644,142.24 73.406,142.24 88.265,142.24 88.265,136.906 111.125,136.906 111.125,142.24 111.252,142.367 130.175,142.367 130.175,82.931 72.644,82.931

## Other copper
Top Layer:
  text "GND" at 119.961,129.848 h1 r270
  text "TX" at 122.501,129.848 h1 r270
  text "RX" at 124.914,129.721 h1 r270
  text "RST" at 78.432,127.962 h1
  text "BOOT" at 116.151,123.498 h1 r270
  text "2023/2024" at 128.397,113.411 h1.52 r90
  text "SDA" at 122.882,99.133 h1
  text "SCL" at 123.009,96.593 h1
  text "VCC" at 99.133,94.923 h1 r270
  text "GND" at 104.213,94.923 h1 r270
  text "SCL" at 106.753,94.923 h1 r270
  text "SDA" at 111.833,94.923 h1 r270
  text "GND" at 122.882,94.053 h1
  text "VCC" at 122.882,91.64 h1
  text "Rato Adaptado" at 74.422,89.281 h1.52
  text "Rodrigo Duarte" at 78.486,84.328 h1.52
  text "Mariana Silva" at 105.791,84.201 h1.52
Multi-Layer:
  circle w0.254: c75.311,85.471 r1.5
  circle w0.254: c127.508,85.471 r1.5
  circle w0.254: c127.508,139.7 r1.5
  circle w0.254: c75.311,139.7 r1.5
  lines w0.254: 73.787,85.471 75.311,85.471 ; 73.787,139.7 75.311,139.7 ; 75.311,83.947 75.311,85.471 ; 75.311,86.995 75.311,85.471 ; 75.311,138.176 75.311,139.7 ; 75.311,141.224 75.311,139.7 ; 76.811,85.471 75.311,85.471 ; 76.811,139.7 75.311,139.7 ; 125.984,85.471 127.508,85.471 ; 125.984,139.7 127.508,139.7 ; 127.508,83.947 127.508,85.471 ; 127.508,86.995 127.508,85.471 ; 127.508,138.176 127.508,139.7 ; 127.508,141.224 127.508,139.7 ; 129.008,85.471 127.508,85.471 ; 129.008,139.7 127.508,139.7